# Altium PCB ground-station.PcbDoc
Units mm, origin at the board's own origin, x right, y up, seen from the top; angles counter-clockwise.
Board outline 50 x 50 mm, 2 copper layers (Top Layer, Bottom Layer), stack 1.571 mm thick; 51 components, 44 nets, 227 pads, 148 vias.
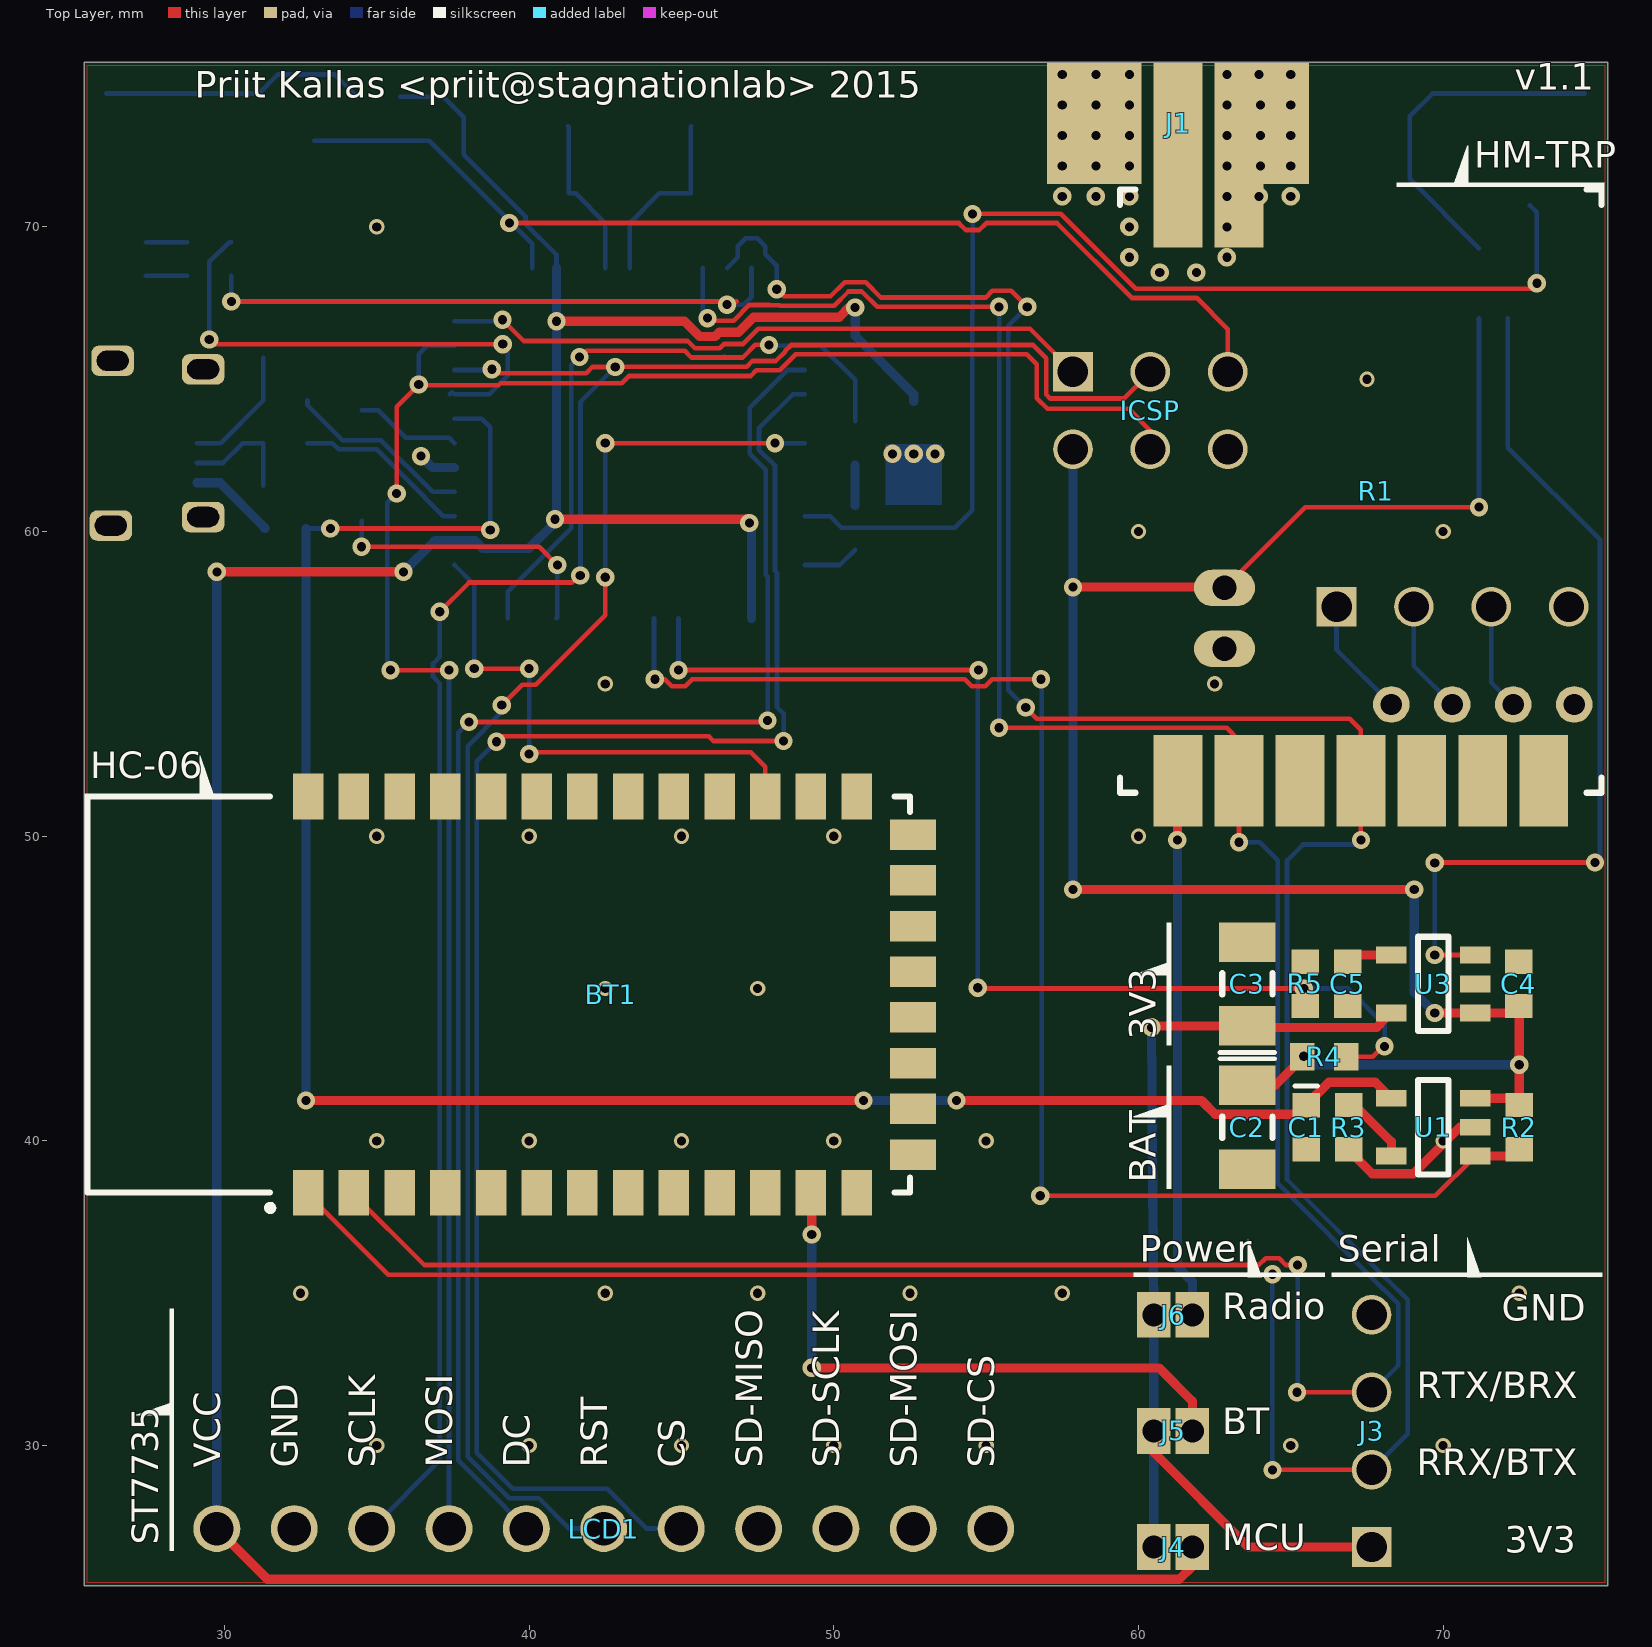
[diagram p0: Top Layer view]
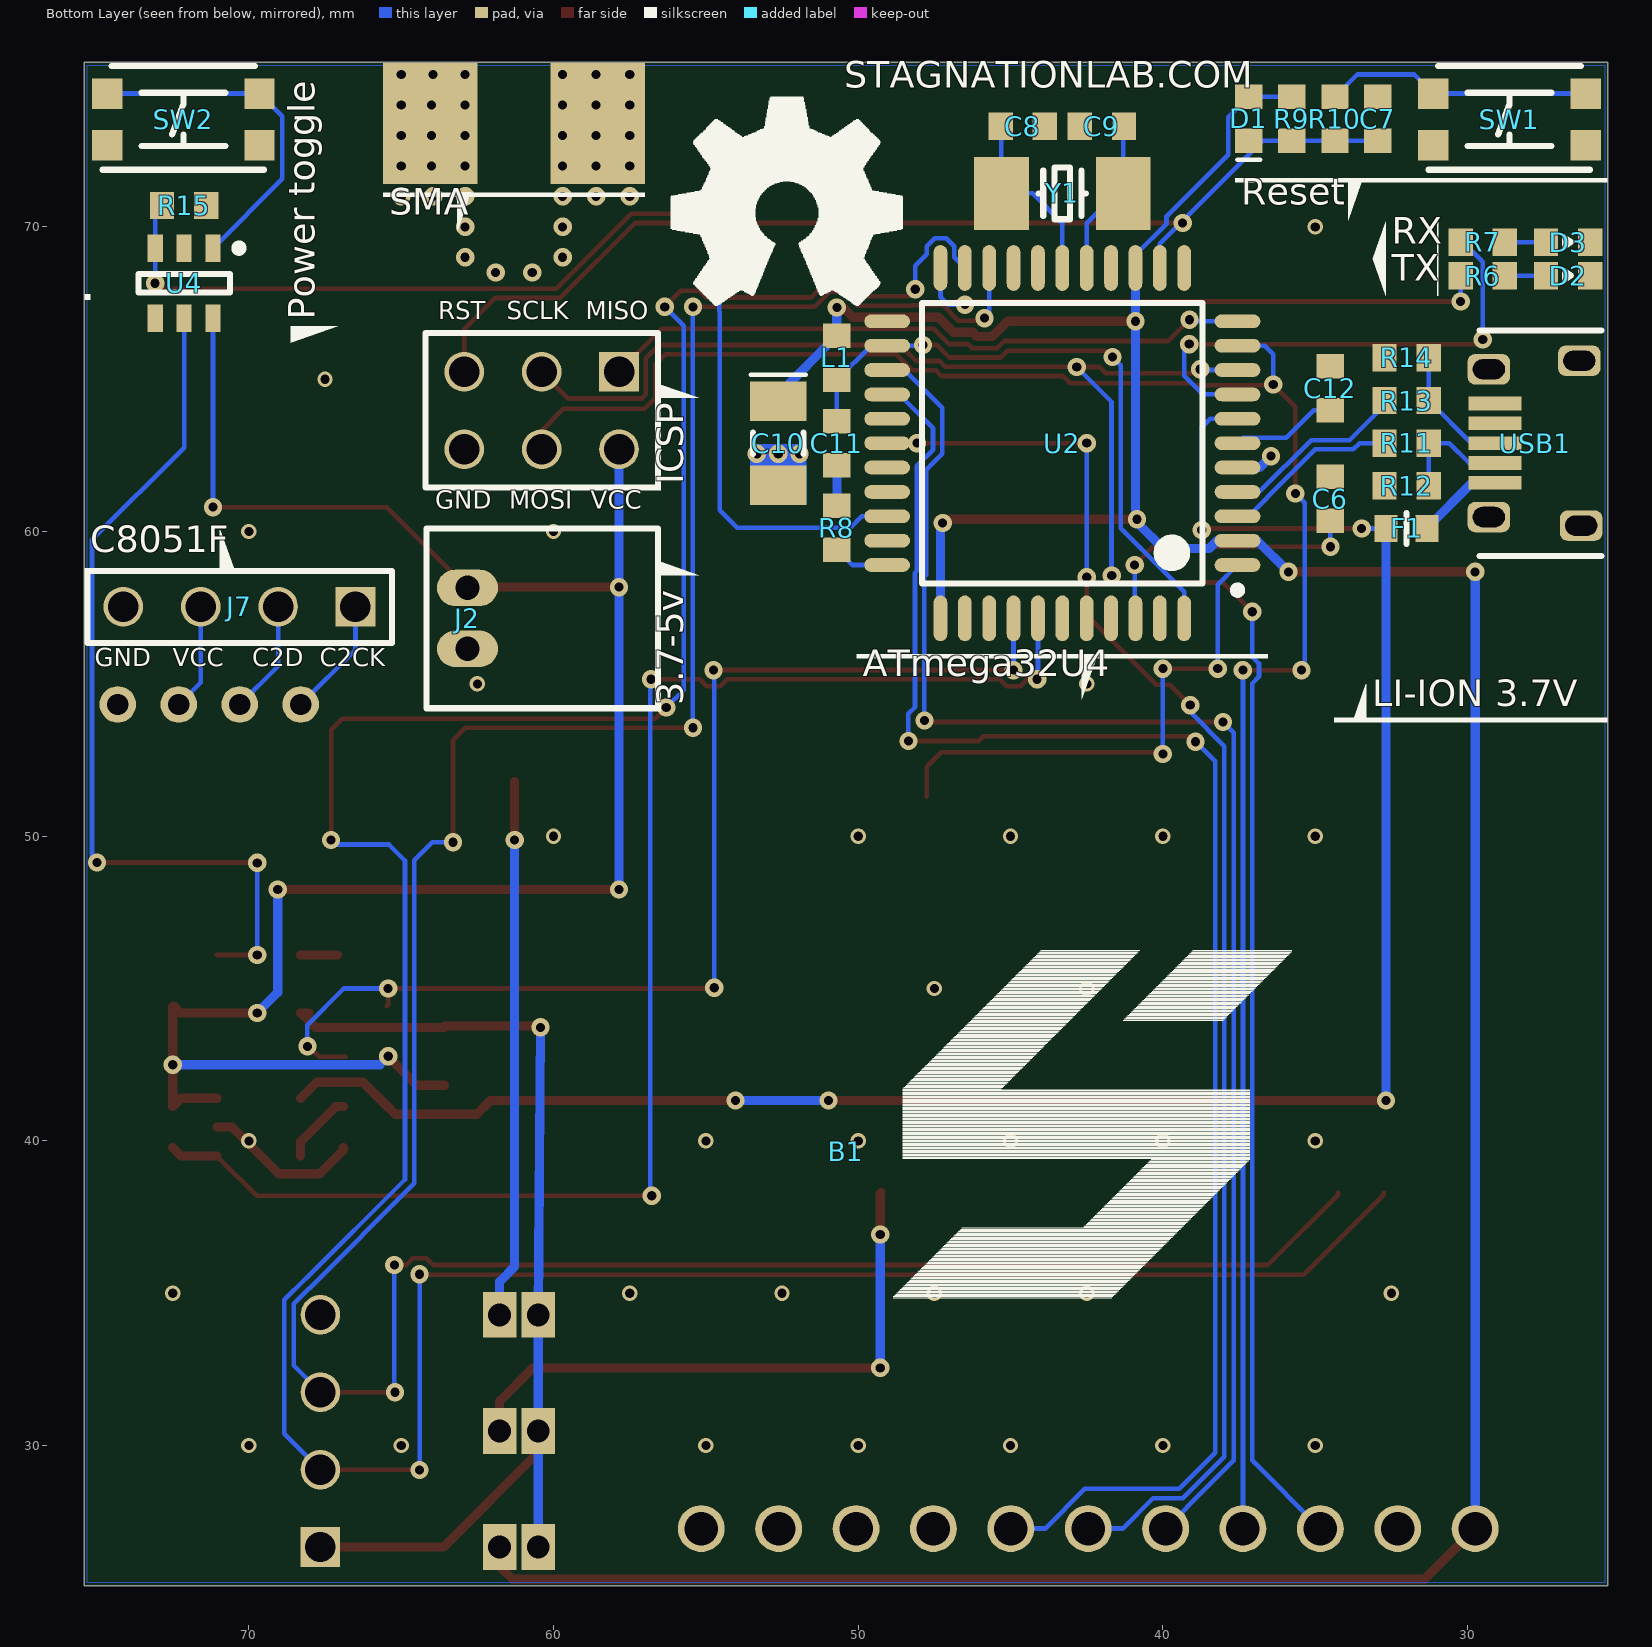
[diagram p1: Bottom Layer view, seen from below]
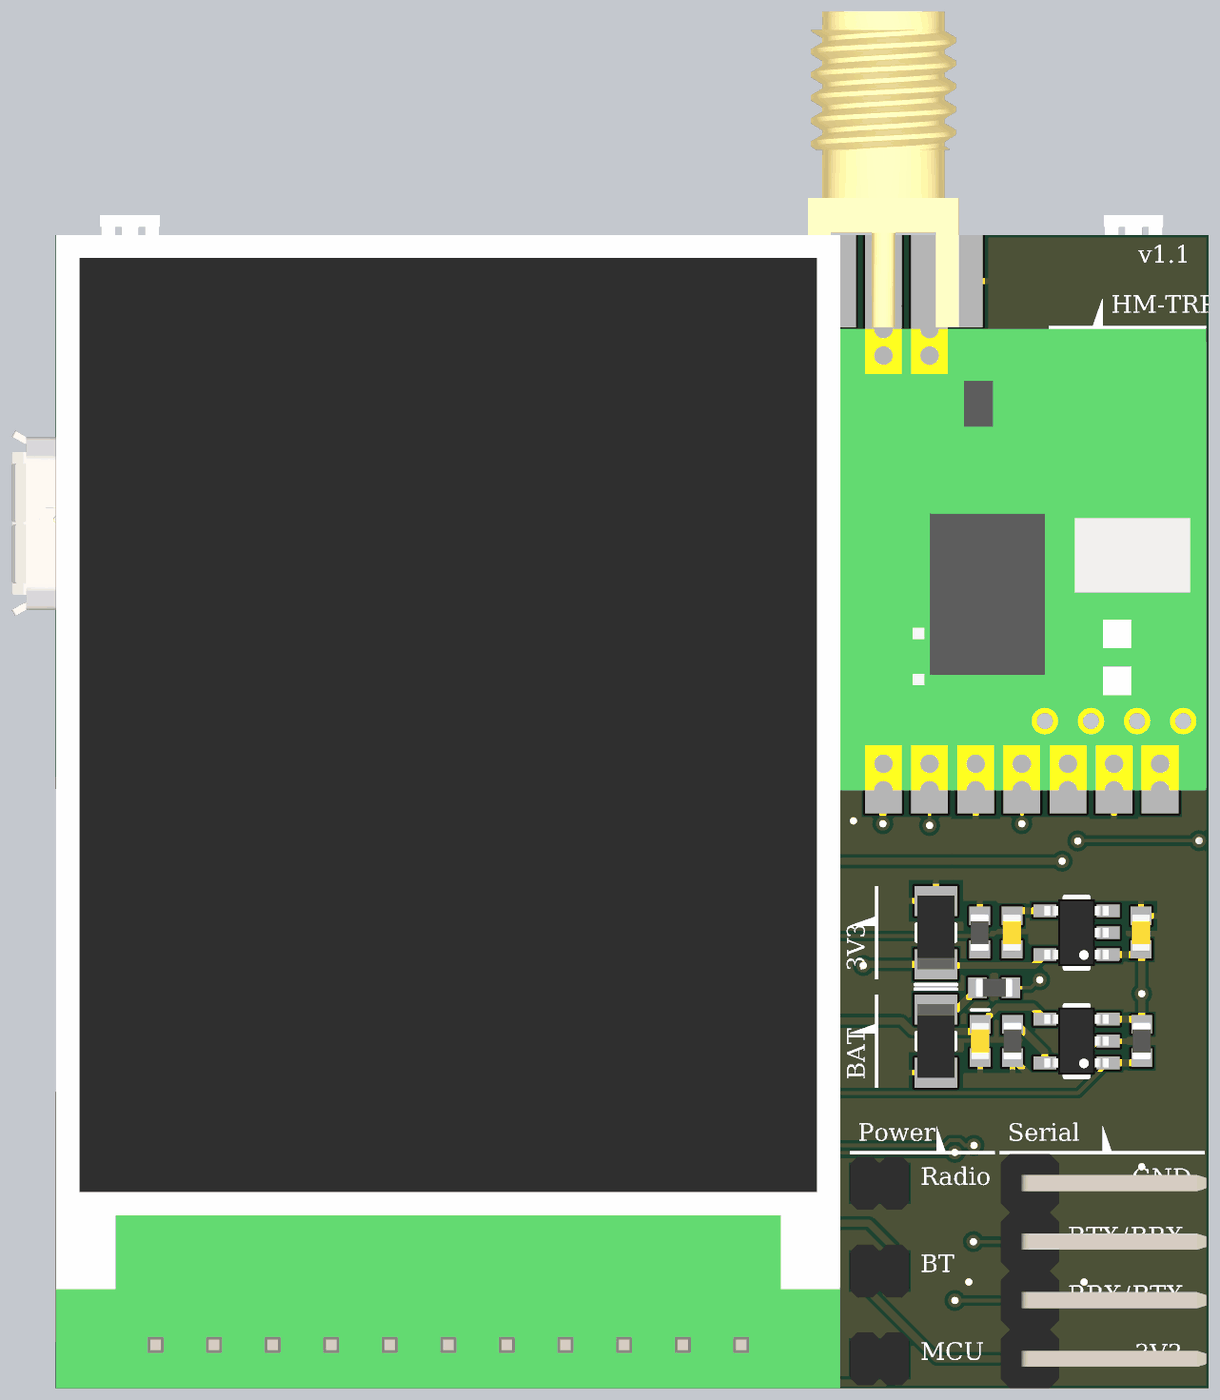
[diagram p2: 3D render of the assembled board from above, using the file's embedded part models]
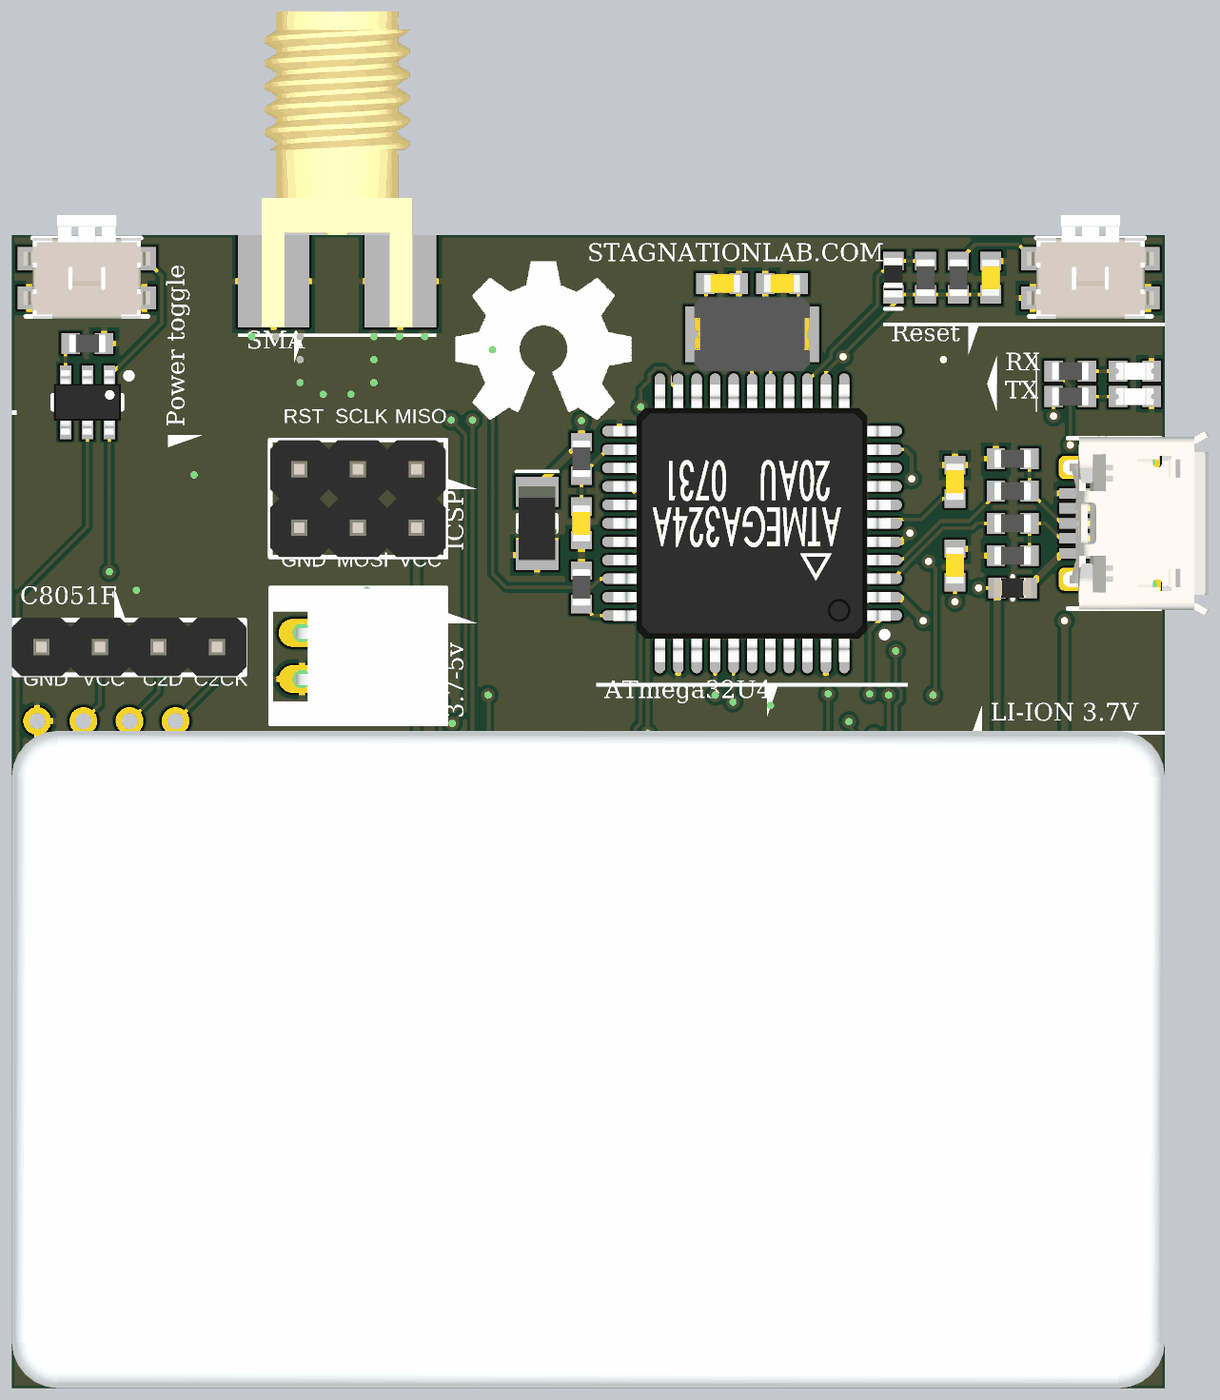
[diagram p3: 3D render of the assembled board from below, using the file's embedded part models]

## Layer stack, top to bottom
Top Solder: solder mask 0.0102, Solder Resist, Dk 3.5
Top Layer: signal copper 0.0356
Dielectric 1: dielectric 1.5, FR-4, Dk 4.8
Bottom Layer: signal copper 0.0356
Bottom Solder: solder mask 0.0102, Solder Resist, Dk 3.5

## Board outline
25.4,25.4 75.4,25.4 75.4,75.4 25.4,75.4

## Design rules (kind name [scope] priority, off if disabled: settings)
Clearance [All] p1: gap=0.152
DiffPairsRouting [All] p1: maxlimit=0.254 minlimit=0.254 mostfreqgap=0.254 toplayer_minwidth=0.152 toplayer_maxwidth=0.381 toplayer_prefwidth=0.152 bottomlayer_minwidth=0.152 bottomlayer_maxwidth=0.381 bottomlayer_prefwidth=0.152 maxuncoupledlength=12.7
HoleSize [All] p1: absolutevalues=TRUE maxlimit=6.35 minlimit=0.3 maxpercent=80.000 minpercent=20.000
MinimumSolderMaskSliver [All] p1: minsoldermaskwidth=0.1
PlaneClearance [All] p1: clearance=0.25
PlaneConnect [All] p1: planeconnectstyle=Relief reliefexpansion=0.5 reliefentries=4 reliefconductorwidth=0.254 reliefairgap=0.254
PolygonConnect PolygonConnect-GND-VIA [InNet('GND') AND IsVia] p1: connectstyle=Direct reliefconductorwidth=0.254 reliefentries=4 polygonreliefangle="90 Angle" airgapwidth=0.254
PolygonConnect [All] p2: connectstyle=Relief reliefconductorwidth=0.254 reliefentries=4 polygonreliefangle="90 Angle" airgapwidth=0.254
RoutingVias [All] p1: holewidth=0.3 width=0.6 viastyle="Through Hole" minholewidth=0.3 minwidth=0.6 maxholewidth=6.35 maxwidth=8
SilkToSilkClearance [All] p1: silktosilkclearance=0
SilkToSolderMaskClearance [IsPad] p1: minsilkscreentomaskgap=0.05 clearancetoexposedcopper=TRUE
SolderMaskExpansion [All] p1: expansion=0.102
UnpouredPolygon [All] p1: allowunpoured=FALSE
Width [All] p1: maxlimit=4 minlimit=0.152 preferedwidth=0.152
22 further rules are at their usual default settings.

## Components (designator, comment, footprint, x,y, rotation, side; value= is the part's Value field where it differs from the comment)
B1 "BATTERY-1000MAH" BATTERY-1000MAH 50.4,39.65 r180 bottom locked
BT1 "HC-06 bluetooth" HC-06-BLUETOOTH 39,44.8 r180 top locked
C1 "CAPACITOR-POLARIZED" CAP-0603-POL 65.5,40.449 r270 top
C2 "CAPACITOR-POLARIZED" CAP-1206-POL 63.575,40.449 r270 top
C3 "CAPACITOR-POLARIZED" CAP-1206-POL 63.575,45.15 r90 top
C4 "CAPACITOR" CAP-0603-GEN 72.475,45.15 r270 top
C5 "CAPACITOR" CAP-0603-GEN 66.875,45.15 r90 top
C6 "CAPACITOR" CAP-0603-GEN 34.5,61.075 r270 bottom
C7 "CAPACITOR" CAP-0603-GEN 32.95,73.549 r270 bottom
C8 "CAPACITOR" CAP-0603-GEN 44.6,73.3 r0 bottom
C9 "CAPACITOR" CAP-0603-GEN 42,73.3 r180 bottom
C10 "CAPACITOR-POLARIZED" CAP-1206-POL 52.625,62.899 r270 bottom
C11 "CAPACITOR" CAP-0603-GEN 50.7,62.9 r270 bottom
C12 "CAPACITOR" CAP-0603-GEN 34.5,64.7 r270 bottom
D1 "DIODE" DIODE-0603 37.175,73.55 r90 bottom
D2 "LED" LED-0603 26.7,68.4 r180 bottom
D3 "LED" LED-0603 26.7,69.5 r180 bottom
F1 "Fuse" FUSE-0603 32,60.1 r0 bottom
ICSP "ICSP" ICSP-HEADER 57.85,65.243 r90 top
J1 "Antenna connector" SMA-PCB 61.3,75.7 r0 top locked
J2 "Connector 2x1" JST-PH-1x2 62.825,57.15 r180 bottom
J3 "Pinheader 1x4" PINHEADER-1x4-right-angle 67.65,26.669 r90 top locked
J4 "Pinheader 1x2" PINHEADER-1x2-SMALL-JUMPER 60.5,26.669 r0 top
J5 "Pinheader 1x2" PINHEADER-1x2-SMALL-JUMPER 60.5,30.479 r0 top
J6 "Pinheader 1x2" PINHEADER-1x2-SMALL-JUMPER 60.5,34.289 r0 top
J7 "Pinheader 1x4" PINHEADER-1x4 66.5,57.535 r0 bottom
L1 "Ferrite bead" FERRITE-0603 50.7,65.7 r90 bottom
LCD1 "LCD" ST7735 42.45,27.275 r0 top locked
R1 "UART radio" HM-TRP 67.3,61.325 r0 top locked
R2 "Resistor" RESISTOR-0603 72.5,40.45 r90 top
R3 "Resistor" RESISTOR-0603 66.9,40.45 r90 top
R4 "RESISTOR" RESISTOR-0603 66.1,42.762 r0 top
R5 "RESISTOR" RESISTOR-0603 65.475,45.15 r270 top
R6 "Resistor" RESISTOR-0603 29.5,68.4 r0 bottom
R7 "Resistor" RESISTOR-0603 29.5,69.5 r0 bottom
R8 "Resistor" RESISTOR-0603 50.7,60.125 r270 bottom
R9 "RESISTOR" RESISTOR-0603 35.775,73.549 r90 bottom
R10 "RESISTOR" RESISTOR-0603 34.35,73.549 r270 bottom
R11 "RESISTOR" RESISTOR-0603 32,62.9 r0 bottom
R12 "Varistor" RESISTOR-0603 32,61.5 r0 bottom
R13 "RESISTOR" RESISTOR-0603 32,64.3 r0 bottom
R14 "Varistor" RESISTOR-0603 32,65.7 r0 bottom
R15 "RESISTOR" RESISTOR-0603 72.125,70.7 r0 bottom
SW1 "434353045816" WURTH-TACTILE-434353045816 28.625,73.525 r0 bottom
SW2 "434353045816" WURTH-TACTILE-434353045816 72.15,73.525 r0 bottom
U1 "Battery charger" SOT23-5 69.675,40.45 r180 top
U2 "ATmega32U4" TQFP44 43.3,62.9 r0 bottom locked
U3 "Reg" SOT23-5 69.675,45.15 r180 top
U4 "on/off controller" SOT23-6 72.125,68.15 r270 bottom
USB1 "USB Connector" USB-MICRO-B 29.1,62.9 r90 bottom locked
Y1 "CRYSTAL" CRYSTAL-5032 43.3,71.1 r0 bottom

## Footprints (in the part's own frame and the unit in brackets; to place one, negate y for a bottom-side part, rotate by r counter-clockwise, add the part's x,y. Pads: shape width x height; smd on the part's side, far side on the other; paste and mask are expansions set on the pad)
BATTERY-1000MAH [mm] "Li-ion battery 50x28.5x7.5"
  body extent -25,-14.25 25,14.25, height 7.5
CAP-0603-GEN [mm] "Non-polarized 0603 (1608) chip capacitor"
  rect 0.8x0.9 smd: 1(-0.725,0) 2(0.725,0)
  body extent -0.8,-0.4 0.8,0.4, height 0.86
CAP-0603-POL [mm] "0603 (1608) polarized chip capacitor"
  rect 0.8x0.9 smd: 1(-0.725,0) 2(0.725,0)
  silkscreen extent -1.35,-0.38 -1.35,0.38, body extent -0.8,-0.4 0.8,0.4, height 0.86
CAP-1206-POL [mm] "1206 (3216) polarized chip capacitor"
  rect 1.3x1.85 smd: 1(-1.375,0) 2(1.375,0)
  silkscreen extent -2.25,-0.9 0.35,0.9, body extent -1.6,-0.8 1.6,0.8, height 1.6
CRYSTAL-5032 [mm] "SMD Crystal 5x3.2mm"
  rect 1.8x2.4 smd: 1(-2,0) 2(2,0)
  silkscreen extent -0.77,-0.85 0.77,0.85, body extent -2.5,-1.6 2.5,1.6, height 1.35
DIODE-0603 [mm] "0603 (1608) Diode"
  rect 0.8x0.9 smd: 1(-0.725,0) 2(0.725,0)
  silkscreen extent -1.35,-0.38 -1.35,0.37, body extent -0.85,-0.4 0.85,0.4, height 0.56
FERRITE-0603 [mm] "Chip resistor 0603 (1608)"
  rect 0.8x0.9 smd: 1(-0.725,0) 2(0.725,0)
  body extent -0.8,-0.4 0.8,0.4, height 0.5
FUSE-0603 [mm] "0603 (1608) resettable fuse"
  rect 0.75x0.9 smd: 1(-0.675,0) 2(0.675,0)
  silkscreen extent 0,-0.5 0,0.5, body extent -0.8,-0.43 0.8,0.43, height 0.45
HC-06-BLUETOOTH [mm] "HC-06 bluetooth module"
  rect 1x1.5 smd: 1(6.25,6.5) 1(6.25,6.5) 2(4.75,6.5) 3(3.25,6.5) 4(1.75,6.5) 5(0.25,6.5) 6(-1.25,6.5) 7(-2.75,6.5) 8(-4.25,6.5) 9(-5.75,6.5) 10(-7.25,6.5) 11(-8.75,6.5) 12(-10.25,6.5) 13(-11.75,6.5) 22(-11.75,-6.5) 23(-10.25,-6.5) 24(-8.75,-6.5) 25(-7.25,-6.5) 26(-5.75,-6.5) 27(-4.25,-6.5) 28(-2.75,-6.5) 29(-1.25,-6.5) 30(0.25,-6.5) 31(1.75,-6.5) 32(3.25,-6.5) 33(4.75,-6.5) 34(6.25,-6.5)
  rect 1.5x1 smd: 14(-13.6,5.25) 15(-13.6,3.75) 16(-13.6,2.25) 17(-13.6,0.75) 18(-13.6,-0.75) 19(-13.6,-2.25) 20(-13.6,-3.75) 21(-13.6,-5.25)
  silkscreen extent -13.5,-6.5 13.5,7.1, body extent -13.5,-6.5 13.5,6.5, height 2
HM-TRP [mm]
  rect 1.6x3 smd: 1(-6,-9.5) 2(-4,-9.5) 3(-2,-9.5) 4(0,-9.5) 5(2,-9.5) 6(4,-9.5) 7(6,-9.5) 8(-4,9.5) 9(-6,9.5)
  round 1.2 hole 0.7: 10(1,-7) 11(3,-7) 12(5,-7) 13(7,-7)
  silkscreen extent -7.9,-9.9 7.9,9.9, body extent -8,-10 8,10, height 2
ICSP-HEADER [mm] "ICSP standard header"
  rect 1.3x1.3 hole 1: 1(0,0)
  round 1.3 hole 1: 2(-2.54,0) 3(0,-2.54) 4(-2.54,-2.54) 5(0,-5.08) 6(-2.54,-5.08)
  body extent -3.81,-6.35 1.27,1.27, height 7.84
JST-PH-1x2 [mm] "JST-PH single row two contact connector"
  oval 2x1.2 hole 0.8: 1(0,1) 2(0,-1)
  silkscreen extent -1.35,-2.95 6.25,2.95, body extent -1.35,-2.98 6.25,2.92, height 4.8
LED-0603 [mm] "0603 (1608) LED"
  rect 0.8x0.9 smd: 1(-0.725,0) 2(0.725,0)
  silkscreen extent -0.13,-0.19 0.13,0.19, body extent -0.82,-0.36 0.83,0.36, height 0.66
PINHEADER-1x2-SMALL-JUMPER [mm] "Small 1.27mm pitch single row two pin header"
  rect 1.1x1.5 hole 0.75: 1(0,0) 2(1.27,0)
  body extent -0.63,-1.15 1.91,1.15, height 4.7
PINHEADER-1x4 [mm] "Single row four pin header"
  rect 1.3x1.3 hole 1: 1(0,0)
  round 1.3 hole 1: 2(2.54,0) 3(5.08,0) 4(7.62,0)
  silkscreen extent -1.2,-1.17 8.8,1.2, body extent -1.27,-1.27 8.89,1.27, height 7.84
PINHEADER-1x4-right-angle [mm] "Single row four pin header"
  rect 1.3x1.3 hole 1: 1(0,0)
  round 1.3 hole 1: 2(2.54,0) 3(5.08,0) 4(7.62,0)
  body extent -1.27,-7.65 8.89,1.27, height 4.14
RESISTOR-0603 [mm] "Chip resistor 0603 (1608)"
  rect 0.8x0.9 smd: 1(-0.725,0) 2(0.725,0)
  body extent -0.8,-0.4 0.8,0.4, height 0.5
SMA-PCB [mm] "SMA PCB connector"
  rect 1.6x4 smd: 1(0,-2.3)
  rect 3.1x4 smd: 2(-2.75,-2.3) 2(2.75,-2.3)
  rect 3.1x4 smd far side: 2(-2.75,-2.3) 2(2.75,-2.3)
  body extent -3.27,-4.3 3.28,9.4, height 3.77
SOT23-5 [mm] "SOT23 5-Leads"
  rect 1x0.55 smd: 1(-1.375,0.95) 2(-1.375,0) 3(-1.375,-0.95) 4(1.375,-0.95) 5(1.375,0.95)
  silkscreen extent -0.5,-1.55 0.5,1.55, body extent -1.4,-1.45 1.4,1.45, height 1.45
SOT23-6 [mm] "6 pin SOT23 package"
  rect 0.9x0.5 smd: 1(-1.15,0.95) 2(-1.15,0) 3(-1.15,-0.95) 4(1.15,-0.95) 5(1.15,0) 6(1.15,0.95)
  silkscreen extent -1.27,-1.5 0.3,1.92, body extent -1.4,-1.45 1.4,1.45, height 1.45
ST7735 [mm] "ST7737 128x160 LCD"
  round 1.54 hole 1.1: 1(-12.7,0) 2(-10.16,0) 3(-7.62,0) 4(-5.08,0) 5(-2.54,0) 6(0,0) 7(2.54,0) 8(5.08,0) 9(7.62,0) 10(10.16,0) 11(12.7,0)
  body extent -17.03,-1.87 16.97,48.13, height 6.64
TQFP44 [mm] "TQFP, 44-Leads, Body 10,00x10,00mm, Pitch 0,80mm"
  oval 1.5x0.45 smd: 1(-5.75,4) 2(-5.75,3.2) 3(-5.75,2.4) 4(-5.75,1.6) 5(-5.75,0.8) 6(-5.75,0) 7(-5.75,-0.8) 8(-5.75,-1.6) 9(-5.75,-2.4) 10(-5.75,-3.2) 11(-5.75,-4) 23(5.75,-4) 24(5.75,-3.2) 25(5.75,-2.4) 26(5.75,-1.6) 27(5.75,-0.8) 28(5.75,0) 29(5.75,0.8) 30(5.75,1.6) 31(5.75,2.4) 32(5.75,3.2) 33(5.75,4)
  oval 0.45x1.5 smd: 12(-4,-5.75) 13(-3.2,-5.75) 14(-2.4,-5.75) 15(-1.6,-5.75) 16(-0.8,-5.75) 17(0,-5.75) 18(0.8,-5.75) 19(1.6,-5.75) 20(2.4,-5.75) 21(3.2,-5.75) 22(4,-5.75) 34(4,5.75) 35(3.2,5.75) 36(2.4,5.75) 37(1.6,5.75) 38(0.8,5.75) 39(0,5.75) 40(-0.8,5.75) 41(-1.6,5.75) 42(-2.4,5.75) 43(-3.2,5.75) 44(-4,5.75)
  silkscreen extent -5.87,-4.6 4.6,4.95, body extent -6.01,-6.01 6.01,6.01, height 1
USB-MICRO-B [mm] "FCI 10103594-0001LF"
  rect 0.45x1.75 smd: 1(-1.3,0) 2(-0.65,0) 3(0,0) 4(0.65,0) 5(1.3,0)
  rrect50% 1x1.4 hole 0.66 slot 1.05 at 90 deg: SH(-2.705,-2.83) SH(-2.425,0.2) SH(2.425,0.2) SH(2.705,-2.77)
  silkscreen extent -3.7,-3.5 3.7,0.5, body extent -4.02,-5.6 4.02,0.43, height 2.89
WURTH-TACTILE-434353045816 [mm] "4.7*3.5mm side push type, J-Bend SMD, height 1.65mm, white actuator, 160gf, T&R"
  rect 1x1 smd: 1(2.5,0.85) 2(2.5,-0.85) 3(-2.5,0.85) 4(-2.5,-0.85)
  silkscreen extent -2.65,-1.75 2.65,1.65, body extent -2.75,-2.75 2.75,1.75, height 1.65

## Part data
B1: "Battery"
BT1: library part HC-06-BLUETOOTH, "HC-06 bluetooth module"
C1 C2 C3 C10: "Polarized capacitor"
C4 C5 C6 C7 C8 C9 C11 C12: "Capacitor"
D1: "Diode"
F1: library part FUSE
ICSP: "In-circuit serial programmer interface"
J1: library part ANTENNA-CONNECTOR
J2: library part CONNECTOR-1x2, "Single row two contact connector"
J3 J7: library part PINHEADER-1x4, "Single row four pin header"
J4 J5 J6: library part PINHEADER-1x2, "Single row two pin header"
L1: library part FERRITE-BEAD
LCD1: library part ST7735, "ST7735 color LCD"
R1: library part HM-TRP, "UART long range radio"
R2 R3 R6 R7 R8: library part RESISTOR-SMALL
R4 R5 R9 R10 R11 R13 R15: "Resistor"
R12 R14: library part VARISTOR
SW1 SW2: library part WURTH-TACTILE-434353045816, "WS-TASU SMD Tact Switch 4.7X3.5 mm side push"
U1: library part BATTERY-CHARGER-MCP73831, "Single cell battery management"
U2: "8-bit AVR Microcontroller, 2.7-5.5V, 16MHz, 32KB Flash, 1KB EEPROM, 2.5KB SRAM, USB Controller, 44-pin TQFP, Industrial Grade (-40°C to 85°C), Ext Osc"
U3: library part SOT23-REG, "Voltage regulator"
U4: library part MAX16054, "Pushbutton on/off controller"
USB1: library part USB-CONNECTOR
Y1: "Crystal oscillator"

## Via types
v1: diameter 0.6, hole 0.3, Top Layer to Bottom Layer, tented both sides, 116 vias
v2: diameter 0.5, hole 0.3, Top Layer to Bottom Layer, tented both sides, 32 vias

## Nets (pads, with @x,y where several pads share a name; then routed paths per layer and width w, separated by ;. In a path a pad name is that pad's centre, name@x,y a point inside that pad or via, vN(x,y) a via of type N, cw(c..) or ccw(c..) an arc to the next point about the centre after c; other vN are vias at no path point)
3V3: C3.1 J3.1 J4.1 J5.1 J6.1 U3.5 | length 34.6
  Top Layer w0.3: v1(60.425,43.725) 60.475,43.775 C3.1 ; J5.1 60.5,29.775 63.606,26.669 J3.1 ; C3.1@63.574,43.724 63.627,43.723 67.823,43.723 67.925,43.825 U3.5 U3.5@68.025,44.2
  Bottom Layer w0.3: v1(60.425,43.725) J6.1 J5.1 J4.1
BAT_SENSE: R4.2 R5.2 U2.37 | length 38.5
  Top Layer w0.152: v1(44.9,55.45) 44.9,55.455 54.429,55.455 54.434,55.45 v1(54.75,55.45) ; v1(54.725,45.025) 54.748,45.002 v1(65.428,45.002) 65.428,44.472 R5.2 ; R4.2 67.687,42.762 68.027,43.102 v1(68.078,43.102)
  Bottom Layer w0.152: v1(44.9,55.45) U2.37 ; v1(54.725,45.025) 54.725,55.425 v1(54.75,55.45) ; v1(65.428,45.002) 66.877,45.002 68.078,43.801 v1(68.078,43.102)
BAT_STATE: R2.1 U1.1 U2.38 | length 48.4
  Top Layer w0.152: v1(44.125,55.15) 44.452,55.15 44.681,54.921 45.119,54.921 45.348,55.15 54.302,55.15 54.531,54.921 54.969,54.921 55.198,55.15 v1(56.8,55.15) ; v1(56.775,38.2) 56.779,38.196 69.746,38.196 U1.1
  Top Layer w0.3: U1.1 72.225,39.5 R2.1@72.5,39.775
  Bottom Layer w0.152: U2.38 44.1,55.175 v1(44.125,55.15) ; v1(56.775,38.2) 56.829,38.254 56.829,55.121 v1(56.8,55.15)
BT_STATUS: BT1.24 U2.1 | length 17.2
  Top Layer w0.152: v1(38.2,55.5) v1(40,55.5) ; v1(40,52.7) 40.05,52.75 47.275,52.75 47.75,52.275 BT1.24
  Bottom Layer w0.152: U2.1 38.2,58.25 v1(38.2,55.5) ; v1(40,52.7) v1(40,55.5)
D+: R13.2 U2.4 | length 6.2
  Bottom Layer w0.152: R13.2 32.725,64.15 33.875,63 35.131,63 36.831,61.3 U2.4
D-: R11.2 U2.3 | length 5.8
  Bottom Layer w0.152: R11.2 33.544,62.9 33.749,62.695 35.005,62.695 36.571,61.129 36.571,61.112 37.184,60.5 U2.3
GND: BT1.13 BT1.21 BT1.22 C1.2 C2.2 C3.2 C4.1 C5.1 C6.1 C7.1 C8.1 C9.1 C10.2 C11.2 C12.1 D2.2 D3.2 ICSP.6 J1.2 J2.2 J3.4 J7.4 LCD1.2 R1.3 R1.6 R1.8 R1.13 R3.1 R5.1 R8.1 R12.2 R14.2 R15.1 SW1.1 SW1.3 SW2.1 SW2.3 U1.2 U2.5 U2.15 U2.23 U2.35 U2.43 U3.2 U4.2 USB1.5 | length 7.8
  Top Layer w0.3: R3.1@66.9,39.775 66.9,39.697 67.675,38.923 69.023,38.923 70.55,40.45 U1.2
  Bottom Layer w0.3: v1(36.45,62.475) 36.825,62.1 U2.5 ; R8.1 C11.2
  other v1: 51.925,62.55 52.625,62.55 53.325,62.55 60.7,68.5 61.9,68.5 59.7,69 62.9,69 59.7,70 62.9,70 57.5,71 58.6,71 59.7,71 62.9,71 63.95,71 65,71 57.5,72 58.6,72 59.7,72 62.9,72 64,72 65,72 57.5,73 58.6,73 59.7,73 62.9,73 64,73 65,73 57.5,74 58.6,74 59.7,74 62.9,74 64,74 65,74 57.5,75 58.6,75 59.7,75 62.9,75 63.95,75 65,75
  other v2: 35,30 40,30 45,30 50,30 55,30 65,30 70,30 32.5,35 42.5,35 47.5,35 52.5,35 57.5,35 72.5,35 35,40 40,40 45,40 50,40 55,40 70,40 42.5,45 47.5,45 35,50 40,50 45,50 50,50 60,50 42.5,55 62.5,55 60,60 70,60 67.5,65 35,70
LCD_CS: LCD1.7 U2.26 | length 53.5
  Top Layer w0.152: v1(38.925,53.1) 39.104,53.279 45.894,53.279 46.048,53.125 v1(48.35,53.125)
  Bottom Layer w0.152: v1(38.925,53.1) 38.284,52.459 38.284,29.763 39.469,28.578 42.559,28.578 43.862,27.275 LCD1.7 ; v1(48.35,53.125) 48.354,53.129 48.354,54.019 48.133,54.239 48.133,58.65 48.071,58.712 48.071,62.152 47.543,62.681 47.543,63.383 48.66,64.5 U2.26
LCD_DC: LCD1.5 U2.25 | length 50.2
  Top Layer w0.152: v1(38.025,53.75) 47.775,53.75 v1(47.825,53.8)
  Bottom Layer w0.152: v1(38.025,53.75) 37.675,53.4 37.675,29.51 38.525,28.66 LCD1.5 ; v1(47.825,53.8) 47.829,53.804 47.829,58.524 47.767,58.586 47.767,62.026 47.238,62.555 47.238,64.063 48.475,65.3 U2.25
LCD_RESET: LCD1.6 U2.28 | length 47.4
  Top Layer w0.152: v1(39.1,54.3) 39.771,54.971 40.219,54.971 42.5,57.252 v1(42.5,58.5) ; v1(42.5,62.9) v1(48.071,62.9)
  Bottom Layer w0.152: v1(39.1,54.3) 39.1,54.077 37.98,52.957 37.98,29.636 39.342,28.274 40.324,28.274 41.322,27.275 LCD1.6 ; v1(42.5,58.5) v1(42.5,62.9) ; v1(48.071,62.9) U2.28
MCU-RESET: C7.2 D1.1 ICSP.5 R9.1 R10.2 U2.13 | length 36
  Top Layer w0.152: v1(39.35,70.125) 54.107,70.125 54.336,69.896 54.774,69.896 55.002,70.125 57.325,70.125 59.783,67.667 61.908,67.667 62.93,66.645 ICSP.5
  Bottom Layer w0.152: C7.2 R10.2 R9.1 36.721,72.824 40.1,69.446 U2.13
MISO: ICSP.1 U2.11 | length 21.6
  Top Layer w0.152: v1(39.125,66.95) 39.821,66.254 45.208,66.254 45.444,66.017 46.261,66.017 46.4,66.157 47.026,66.157 47.523,66.654 56.439,66.654 ICSP.1
  Bottom Layer w0.152: U2.11 39.075,66.9 v1(39.125,66.95)
MOSI: ICSP.4 LCD1.4 U2.10 | length 69
  Top Layer w0.152: v1(35.45,55.45) v1(37.375,55.45) ; v1(35.65,61.25) 35.65,64.096 36.377,64.823 36.404,64.796 38.994,64.796 39.069,64.871 43.044,64.871 43.276,65.103 47.265,65.103 47.454,65.292 48.22,65.292 48.744,65.815 56.335,65.815 56.667,65.483 56.667,64.372 57.013,64.025 59.675,64.025 60.39,63.31 ICSP.4
  Bottom Layer w0.152: v1(35.45,55.45) 35.346,55.554 35.346,60.946 v1(35.65,61.25) ; v1(36.377,64.828) 36.377,65.823 36.654,66.1 U2.10 ; LCD1.4 37.37,55.445 v1(37.375,55.45)
NetC5_2: C5.2 U3.4 | length 1.2
  Top Layer w0.3: C5.2@67.1,46.1 U3.4
NetC6_2: C6.2 U2.42 | length 9.3
  Top Layer w0.152: v1(34.5,59.5) 40.325,59.5 v1(40.925,58.9) ; v1@34.5,59.55 v1@34.525,59.525
  Bottom Layer w0.152: v1@34.5,59.55 C6.2 ; U2.42 40.925,57.175 v1(40.925,58.9)
NetC11_1: C11.1 L1.1 U2.24 U2.44 | length 20.9
  Top Layer w0.152: v1(41.65,65.725) 41.662,65.713 41.878,65.929 45.102,65.929 45.318,65.713 46.387,65.713 46.412,65.738 46.437,65.713 47.013,65.713 47.425,66.125 v1(47.875,66.125)
  Bottom Layer w0.152: U2.44 39.3,58.023 41.381,60.103 41.381,65.456 v1(41.65,65.725) ; v1(47.875,66.125) 47.85,66.1 U2.24 49.575,66.1 L1.1 C11.1
NetC12_2: C12.2 U2.6 | length 3.5
  Bottom Layer w0.152: C12.2 35.05,63.975 35.95,63.075 37.375,63.075 U2.6
NetD2_1: D2.1 R6.1 | length 1.4
  Bottom Layer w0.152: D2.1 R6.1
NetD3_1: D3.1 R7.1 | length 1.4
  Bottom Layer w0.152: D3.1 R7.1
NetF1_1: F1.1 USB1.1 | length 2.9
  Bottom Layer w0.305: USB1.1 29.85,61.6 31.325,60.125 F1.1
NetR3_2: R3.2 U1.5 | length 2.4
  Top Layer w0.3: R3.2@66.9,41.125 67.15,41.125 68.3,39.975 U1.5
NetR8_2: R8.2 U2.33 | length 1.9
  Bottom Layer w0.152: U2.33 50.2,58.9 R8.2
NetR10_1: R10.1 SW1.2 SW1.4 | length 8.8
  Bottom Layer w0.152: SW1.4 SW1.2 31.75,75 33.624,75 R10.1
NetR11_1: R11.1 R12.1 USB1.2 | length 3.8
  Bottom Layer w0.152: USB1.2 29.95,62.25 30.6,62.9 R11.1 R12.1
NetR13_1: R13.1 R14.1 USB1.3 | length 4.2
  Bottom Layer w0.152: USB1.3 29.875,62.9 R13.1 R14.1
NetSW2_2: SW2.2 SW2.4 U4.1 | length 11.3
  Bottom Layer w0.152: U4.1 68.9,71.575 68.9,73.625 SW2.4 SW2.2
POWER_ENABLED: U3.3 U4.5 | length 28.8
  Top Layer w0.152: v1(69.725,46.1) U3.3 ; v1(69.725,49.125) 69.738,49.138 v1(74.988,49.138)
  Bottom Layer w0.152: v1(69.725,46.1) v1(69.725,49.125) ; U4.5 72.125,62.75 75.15,59.725 75.15,49.3 v1(74.988,49.138)
POWER_OFF: R15.2 U2.31 U4.3 | length 37.9
  Top Layer w0.152: v1(54.555,70.425) 54.55,70.43 57.451,70.43 59.91,67.971 72.896,67.971 v1(73.075,68.15)
  Bottom Layer w0.152: U2.31 49.877,60.5 50.252,60.125 53.975,60.125 54.548,60.698 54.548,67.204 54.555,67.211 v1(54.555,70.425) ; R15.2 73.075,70.475 U4.3 v1(73.075,68.15)
RADIO_ANT: J1.1 R1.9
RADIO_C2CK: J7.1 R1.10 | length 4
  Bottom Layer w0.152: J7.1 66.5,56.125 R1.10
RADIO_C2D: J7.2 R1.11 | length 3.7
  Bottom Layer w0.152: J7.2 69.04,55.585 R1.11
RADIO_RX: BT1.1 J3.2 R1.4 U2.21 | length 108.6
  Top Layer w0.152: BT1.1@32.75,38.3 32.75,38.227 35.377,35.6 64.475,35.6 64.495,35.62 v1(64.395,35.62) ; v1(48.125,67.95) 48.355,67.72 49.892,67.72 50.355,68.183 51.045,68.183 51.549,67.68 54.982,67.68 55.206,67.904 55.821,67.904 v1(56.35,67.375) ; v1(56.3,54.225) 56.667,53.858 66.933,53.858 67.3,53.492 v1(67.3,49.875) ; v1(64.4,29.2) 67.641,29.2 J3.2
  Bottom Layer w0.152: U2.21 46.846,68.996 46.846,69.363 47.112,69.629 47.488,69.629 47.754,69.363 47.754,69.096 48.125,68.725 v1(48.125,67.95) ; v1(56.3,54.225) 55.73,54.795 55.73,66.755 v1(56.35,67.375) ; v1(64.395,35.62) 64.395,29.205 v1(64.4,29.2) ; v1@67.3,49.725 65.4,49.725 64.875,49.2 64.875,38.731 68.134,35.472 68.14,35.472 68.833,34.779 68.833,30.392 J3.2
RADIO_TX: BT1.2 J3.3 R1.2 U2.20 | length 97
  Top Layer w0.152: BT1.2 34.25,38.227 36.552,35.925 63.952,35.925 64.176,36.149 64.614,36.149 64.838,35.925 v1(65.225,35.925) ; v1(45.852,67.003) 45.936,66.919 46.711,66.919 47.229,67.437 47.89,67.437 47.906,67.421 48.223,67.421 48.228,67.416 50.018,67.416 50.481,67.879 50.919,67.879 51.423,67.375 v1(55.425,67.375) ; v1(55.425,53.557) 55.429,53.554 62.896,53.554 63.3,53.15 R1.2 v1(63.3,49.8) ; v1(65.2,31.75) 67.649,31.75 J3.3
  Bottom Layer w0.152: U2.20 45.7,67.156 v1(45.852,67.003) ; v1(55.425,53.557) v1(55.425,67.375) ; v1(63.3,49.8) 63.975,49.8 64.57,49.205 64.57,38.605 68.007,35.168 68.014,35.168 68.529,34.653 68.529,32.628 J3.3 ; v1(65.2,31.75) 65.225,31.775 v1(65.225,35.925)
RADIO_VCC: J7.3 R1.12 | length 3.5
  Bottom Layer w0.152: J7.3 71.58,55.045 R1.12
RX-LED: R7.2 U2.8 | length 16.5
  Top Layer w0.152: v1(29.5,66.3) 29.65,66.15 v1(39.135,66.15)
  Bottom Layer w0.152: v1(29.5,66.3) 29.5,68.848 30.152,69.5 R7.2 ; U2.8@37.4,64.5 U2.8@37.475,64.575 ; U2.8 38.698,64.5 39.304,65.106 39.304,65.981 v1(39.135,66.15)
SCLK: ICSP.3 LCD1.3 U2.9 | length 69.5
  Top Layer w0.152: v1(37.065,57.365) 38.025,58.325 41.4,58.325 41.628,58.553 v1(41.677,58.553) ; v1(38.775,65.325) 38.904,65.196 41.869,65.196 42.073,65.4 ; v1(42.825,65.4) 42.073,65.4 ; ICSP.3 59.511,64.364 57.105,64.364 56.971,64.498 56.971,65.69 56.541,66.12 48.596,66.12 48.404,65.927 48.404,65.906 48.094,65.596 47.328,65.596 47.139,65.408 42.08,65.408 42.073,65.4
  Bottom Layer w0.152: LCD1.3 37.065,29.51 37.065,55.012 36.846,55.231 36.846,55.669 37.065,55.888 v1(37.065,57.365) ; U2.9 38.75,65.3 v1(38.775,65.325) ; v1(41.677,58.553) 41.685,58.561 41.685,64.26 v1(42.825,65.4)
TX-LED: R6.2 U2.22 | length 19.6
  Top Layer w0.152: v1(30.225,67.55) 46.806,67.55 46.703,67.448 v1(46.492,67.448)
  Bottom Layer w0.152: v1(30.225,67.55) R6.2 ; v1(46.492,67.448) 47.047,67.448 47.3,67.701 U2.22
VCC: C2.1 C4.2 ICSP.2 J2.1 R2.2 R4.1 U1.3 U3.1 U4.6 | length 67.7
  Top Layer w0.152: J2.1 65.475,60.8 v1(71.175,60.8)
  Top Layer w0.3: v1(57.85,48.25) v1(69.05,48.25) ; v1(57.85,58.175) 62.8,58.175 J2.1 ; C2.1 64.487,41.824 R4.1@65.425,42.762 ; v1(69.725,44.2) U3.1 72.25,44.2 C4.2 ; U1.3 72.225,41.4 R2.2@72.475,41.15 ; R2.2@72.5,41.125 C4.2@72.5,44.4
  Bottom Layer w0.152: v1(71.175,60.8) U4.6
  Bottom Layer w0.3: v1(57.85,48.25) v1(57.85,58.175) ICSP.2 ; v1(65.425,42.775) 65.7,42.5 v1(72.5,42.5) ; v1(69.05,48.25) 69.05,44.875 v1(69.725,44.2)
VCC_BT: BT1.12 J5.2 | length 19.7
  Top Layer w0.3: BT1.12 49.275,38.275 v1(49.275,36.925) ; v1(49.275,32.55) 60.675,32.55 61.77,31.455 J5.2
  Bottom Layer w0.3: v1(49.275,32.55) v1(49.275,36.925)
VCC_MCU: C10.1 D1.2 J4.2 L1.2 LCD1.1 R9.2 U2.2 U2.14 U2.34 | length 117.8
  Top Layer w0.305: LCD1.1 31.411,25.614 61.339,25.614 61.77,26.045 J4.2 ; v1(29.75,58.675) v1(35.875,58.675) ; v1(40.852,60.403) 47.172,60.403 47.227,60.348 v1(47.227,60.278) ; v1(40.9,66.9) 45.1,66.9 45.602,66.398 46.103,66.398 46.242,66.538 46.868,66.538 47.365,67.035 50.176,67.035 50.491,67.35 v1(50.7,67.35)
  Bottom Layer w0.152: R9.2 D1.2 ; D1.2 37.854,73.596 37.854,72.369 39.879,70.344 39.879,70.098 40.9,69.077 U2.14
  Bottom Layer w0.305: LCD1.1 v1(29.75,58.675) ; v1(35.875,58.675) 36.9,59.7 U2.2 38.22,59.7 38.474,59.445 39.99,59.445 40.82,60.275 v1@40.85,60.275 ; v1(40.852,60.403) 40.852,60.373 40.9,60.325 v1(40.9,66.9) U2.14 ; v1(47.227,60.278) 47.297,60.278 47.3,60.275 U2.34 ; v1(50.7,67.35) L1.2 52.625,64.5 C10.1
VCC_RADIO: J6.2 R1.1 | length 17.6
  Top Layer w0.3: v1(61.275,49.875) R1.1@61.275,51.8
  Bottom Layer w0.3: v1@61.275,49.775 61.275,35.875 61.77,35.38 J6.2
VUSB: C1.1 F1.2 U1.4 U2.7 | length 66
  Top Layer w0.152: v1(33.475,60.1) 38.675,60.1 v1(38.725,60.05)
  Top Layer w0.305: v1(32.675,41.325) v1(50.975,41.325) ; v1(54.025,41.325) 62.068,41.325 62.524,40.87 65.195,40.87 C1.1 66.251,41.925 67.775,41.925 U1.4
  Bottom Layer w0.152: F1.2 v1(33.475,60.1) ; U2.7 38.45,63.7 38.725,63.425 v1(38.725,60.05)
  Bottom Layer w0.305: v1(32.675,41.325) F1.2 ; v1(50.975,41.325) v1(54.025,41.325)
XTAL1: C8.2 U2.17 Y1.2 | length 6.1
  Bottom Layer w0.152: U2.17 43.3,70.125 44.275,71.1 Y1.2 45.3,73.275 C8.2
XTAL2: C9.2 U2.16 Y1.1 | length 5.3
  Bottom Layer w0.152: C9.2 41.3,73.275 Y1.1 41.525,71.1 42.5,70.125 U2.16
pads on no net: BT1.3 BT1.4 BT1.5 BT1.6 BT1.7 BT1.8 BT1.9 BT1.10 BT1.11 BT1.14 BT1.15 BT1.16 BT1.17 BT1.18 BT1.19 BT1.20 BT1.23 BT1.25 BT1.26 BT1.27 BT1.28 BT1.29 BT1.30 BT1.31 BT1.32 BT1.33 BT1.34 LCD1.8 LCD1.9 LCD1.10 LCD1.11 R1.5 R1.7 U2.12 U2.18 U2.19 U2.27 U2.29 U2.30 U2.32 U2.36 U2.39 U2.40 U2.41 U4.4 USB1.4 USB1.SH

## Polygon pours and split planes (outlines as drawn)
GND on Top Layer "Top GND" (solid, shelved, pour order 4): 25.5,75.3 75.3,75.3 75.3,25.5 25.5,25.5 25.5,75.3
GND on Bottom Layer "Bottom GND" (solid, shelved, pour order 3): 75.3,75.3 25.5,75.3 25.5,25.5 75.3,25.5 75.3,75.3

## Other copper
Bottom Layer:
  rectangle net GND: 51.7,60.875 53.55,62.875

## Silkscreen, mask and mechanical layers (free items; w line width, h text height)
Top Overlay:
  rectangle: 75.1,71.15 75.3,71.45
  region: 75.3,71.311 75.3,71.461 68.475,71.461 68.475,71.311
  rectangle: 28.188,26.535 28.338,34.5
  rectangle: 25.4,51.2 25.6,51.397
  region: 66.337,35.681 66.337,35.531 75.225,35.531 75.225,35.681
  region: 59.837,35.681 59.837,35.531 66.125,35.531 66.125,35.681
  rectangle: 60.926,43.125 61.076,47.175
  rectangle: 60.926,38.425 61.076,42.475
  region: 27.099,30.99 28.338,30.99 28.338,31.44 27.099,31.005
  region: 29.182,52.636 29.182,51.397 29.632,51.397 29.198,52.636
  region: 70.82,72.666 70.82,71.45 70.37,71.45 70.796,72.666
  region: 70.792,36.831 70.792,35.531 71.248,35.531
  region: 63.59,36.758 63.59,35.531 64.04,35.531 63.61,36.758
  region: 59.833,45.443 61.072,45.443 61.072,45.893 59.833,45.458
  region: 59.85,40.781 61.065,40.781 61.065,41.231 59.85,40.805
  text "v1.1" at 72.35,74.2 h1.5
  text "Priit Kallas <priit@stagnationlab> 2015" at 29.023,73.95 h1.5
  text "HM-TRP" at 71.02,71.65 h1.5
  text "HC-06" at 25.6,51.608 h1.5
  text "3V3" at 60.861,43.325 h1.5 r90
  text "BAT" at 60.865,38.625 h1.5 r90
  text "Power" at 60.037,35.742 h1.5
  text "Serial" at 66.537,35.742 h1.5
  text "Radio" at 62.75,33.85 h1.5
  text "GND" at 71.925,33.801 h1.5
  text "RTX/BRX" at 69.139,31.263 h1.5
  text "BT" at 62.75,30.071 h1.5
  text "RRX/BTX" at 69.139,28.725 h1.5
  text "ST7735" at 28.127,26.735 h1.5 r90
  text "MCU" at 62.75,26.261 h1.5
  text "3V3" at 72.029,26.188 h1.5
Bottom Overlay:
  drawing of 871 lines, arcs and shapes, not listed
  text "STAGNATIONLAB.COM" at 50.45,74.275 h1.5
  text "Reset" at 37.425,70.425 h1.5
  text "SMA" at 65.4,70.1 h1.5
  text "RX" at 32.484,69.15 h1.5
  text "TX" at 32.487,67.935 h1.5
  text "Power toggle" at 67.543,66.943 h1.5 r270
  text "ICSP" at 55.45,61.55 h1.5 r270
  text "C8051F" at 75.2,59.021 h1.5
  text "C2CK" at 67.669,55.375 h1
  text "C2D" at 69.888,55.375 h1
  text "VCC" at 72.504,55.375 h1
  text "GND" at 75.066,55.375 h1
  text "ATmega32U4" at 49.85,54.95 h1.5
  text "3.7-5v" at 55.45,54.3 h1.5 r270
  text "LI-ION 3.7V" at 33.125,53.964 h1.5
Mechanical 1:
  the board outline again, w0.2

## Text inside footprints (layer, text, board x,y; h text height)
ICSP: Bottom Overlay "GND" at 63.876,60.543 h1; Bottom Overlay "RST" at 63.78,66.768 h1; Bottom Overlay "MOSI" at 61.459,60.543 h1; Bottom Overlay "SCLK" at 61.536,66.768 h1; Bottom Overlay "VCC" at 58.774,60.543 h1; Bottom Overlay "MISO" at 58.94,66.768 h1
LCD1: Top Overlay "VCC" at 30.158,29.275 h1.5 r90; Top Overlay "GND" at 32.7,29.275 h1.5 r90; Top Overlay "SCLK" at 35.24,29.275 h1.5 r90; Top Overlay "MOSI" at 37.779,29.275 h1.5 r90; Top Overlay "DC" at 40.318,29.275 h1.5 r90; Top Overlay "RST" at 42.859,29.275 h1.5 r90; Top Overlay "CS" at 45.399,29.275 h1.5 r90; Top Overlay "SD-MISO" at 47.939,29.275 h1.5 r90; Top Overlay "SD-SCLK" at 50.479,29.275 h1.5 r90; Top Overlay "SD-MOSI" at 53.019,29.275 h1.5 r90; Top Overlay "SD-CS" at 55.558,29.275 h1.5 r90